# EAGLE board fifth (EAGLE 7.1.0)
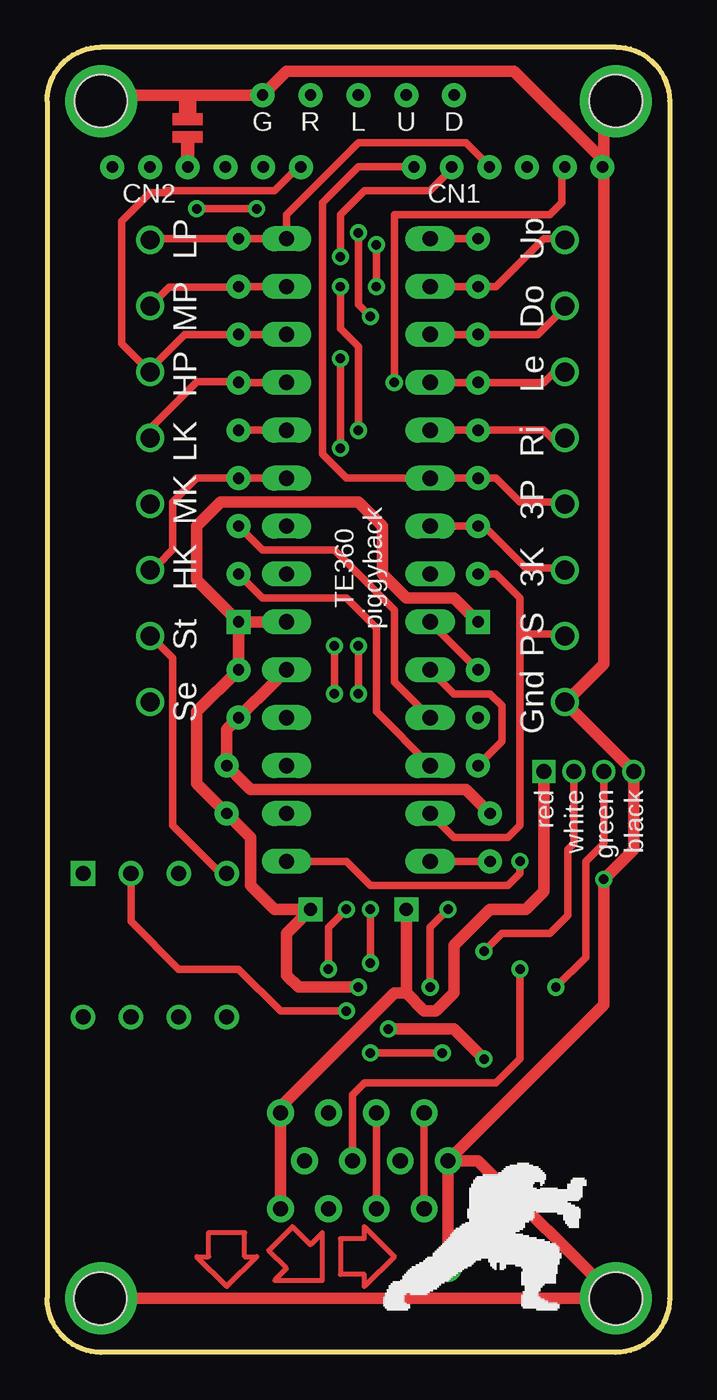
[diagram p0: board, top side]
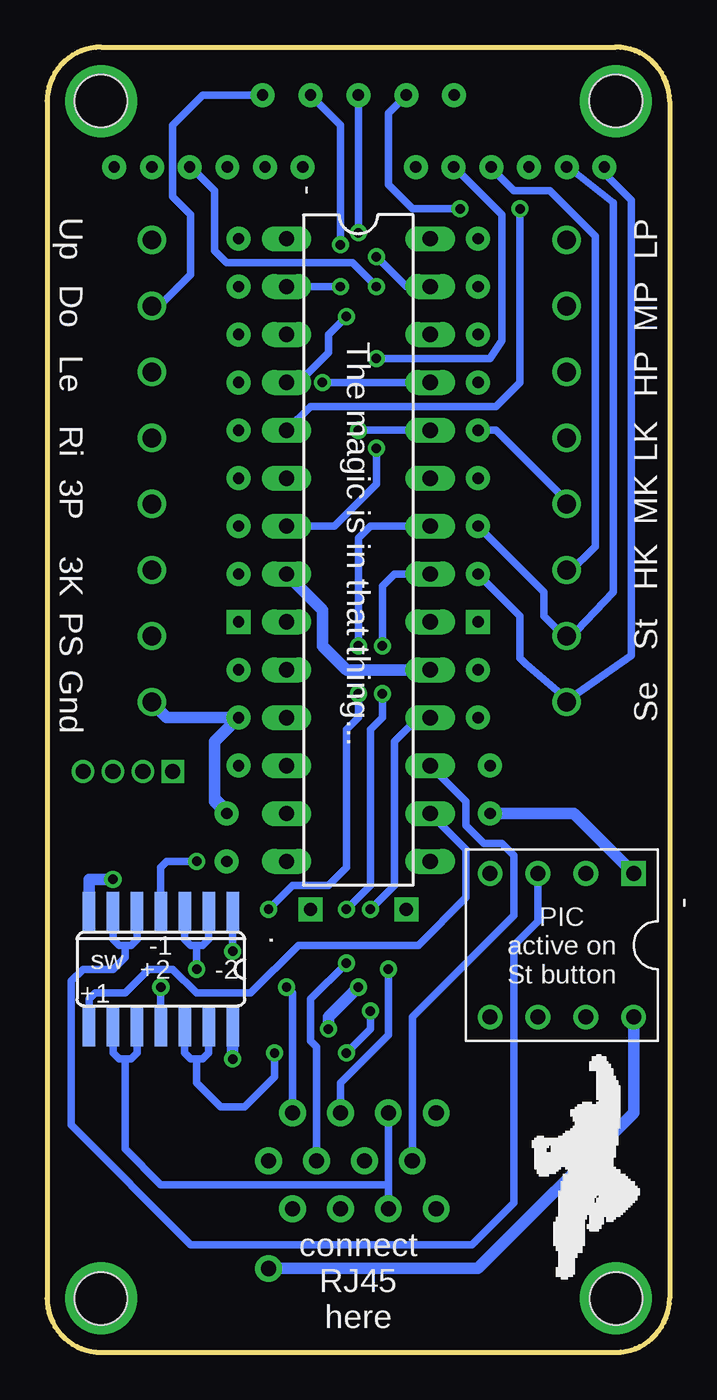
[diagram p1: board, bottom side, seen from below]

Size 33.02 x 69.21 mm. Coordinates in mm from the lower left corner, seen from the top.
Outline: 33.02,66.36 33.02,2.86 arc-90 30.16,0 2.86,0 arc-90 0,2.86 0,66.36 arc-90 2.86,69.21 30.16,69.21 arc-90 33.02,66.36
Copper layers (1*16): Top 0.035mm / dielectric 1.5mm / Bottom 0.035mm
Design rules "default *": minimum track width 10mil, minimum drill 24mil, track to track 8mil, track to pad 8mil, pad to pad 8mil, via to via 8mil, smd to smd 8mil, copper to edge 40mil, drill to drill 8mil, minimum pad ring 10mil, minimum via ring 8mil, stop-mask expansion 4mil, vias tented up to drill 20mil, thermal gap 10mil
Holes 2.8 mm at 2.86,66.36 30.16,66.36 30.16,2.86 2.83,2.86

## Footprints (pad centres in the part's own frame; a part is rotated, then mirrored left to right if it is on the bottom)
DIL28 = drill 0.813 long: 1 -16.51,-3.81; 2 -13.97,-3.81; 3 -11.43,-3.81; 4 -8.89,-3.81; 5 -6.35,-3.81; 6 -3.81,-3.81; 7 -1.27,-3.81; 8 1.27,-3.81; 9 3.81,-3.81; 10 6.35,-3.81; 11 8.89,-3.81; 12 11.43,-3.81; 13 13.97,-3.81; 14 16.51,-3.81; 15 16.51,3.81; 16 13.97,3.81; 17 11.43,3.81; 18 8.89,3.81; 19 6.35,3.81; 20 3.81,3.81; 21 1.27,3.81; 22 -1.27,3.81; 23 -3.81,3.81; 24 -6.35,3.81; 25 -8.89,3.81; 26 -11.43,3.81; 27 -13.97,3.81; 28 -16.51,3.81
DIP8 = drill 0.8 square: 1 -3.81,-3.81 | drill 0.8: 2 -1.27,-3.81; 3 1.27,-3.81; 4 3.81,-3.81; 5 3.81,3.81; 6 1.27,3.81; 7 -1.27,3.81; 8 -3.81,3.81
SO14 = smd 0.66 x 2.032: 1 -3.81,-3.073; 2 -2.54,-3.073; 3 -1.27,-3.073; 4 0,-3.073; 5 1.27,-3.073; 6 2.54,-3.073; 7 3.81,-3.073; 8 3.81,3.073; 9 2.54,3.073; 10 1.27,3.073; 11 0,3.073; 12 -1.27,3.073; 13 -2.54,3.073; 14 -3.81,3.073

## Placement (x,y rotation side)
'  [DIL28]  16.51,42.55 270 bottom
-  [DIP8]  5.72,21.59 180 bottom
.  [SO14]  26.99,20.32 180 bottom

## Library data of the parts
' = pic18f2550
- = dp_devices
. = 40xx

## Nets
S$4: '.20 -.1
S$6: -.3
S$13: '.16
S$16: '.7
S$17: '.27
S$23: '.25
S$24: -.2
S$27: '.8 '.19
S$28: '.6
S$54: '.24
S$55: '.5
S$59: '.4
S$60: -.8
S$62: '.2

## Tracks (layer width: path | path; a pad name or v marks a point on that pad's centre or on a via)
S$1  (via drill 0.6 pad 1.27, 1 pad 3.81)
  Top 0.406: v11.43,66.67 7.94,66.67 | 7.3,65.72 7.3,66.04
  Top 0.61: 29.53,63.18 29.53,36.51 27.62,34.61 | 29.53,63.18 24.77,67.94 12.7,67.94 v11.43,66.67 7.62,66.67 | 29.53,63.18 29.53,65.72 v30.16,66.36 | 7.62,66.67 7.3,66.67 | 7.3,66.67 3.17,66.67 v2.86,66.36 | 7.62,66.67 7.62,65.72 | 7.3,66.67 7.3,65.72
S$3
  Top 0.406: 5.4,59.05 12.7,59.05 12.7,60.32 16.51,64.13 22.23,64.13 23.5,62.86
S$4  (via drill 0.5 pad 0.25, 0.6 pad 1.27, 0.7 pad 1.27)
  Top 0.406: 7.94,33.97 7.94,30.48
  Top 0.61: v10.16,38.73 v10.16,36.19 7.94,33.97 7.94,30.16 v9.52,28.57 10.8,27.3 10.8,24.76 12.07,23.5 v13.97,23.5 12.7,22.22 12.7,20 13.34,19.37 v16.51,19.37 | v10.16,38.73 '.20 | v10.16,38.73 7.94,40.96 7.94,43.81 9.21,45.08 16.51,45.08 17.78,43.81 17.78,41.27 19.05,40 21.59,40 v22.86,38.73 | v23.18,15.56 21.59,17.14 v18.1,17.14
  Bottom 0.61: -.1 5.08,28.57 v9.52,28.57 | v16.51,19.37 18.1,17.78 v18.1,17.14 | 23.18,16.51 v23.18,15.56
S$5  (via drill 0.8 pad 1.42)
  Bottom 0.406: v14.92,12.7 14.92,8.89 | 14.92,8.89 26.99,8.89 28.89,10.79 28.89,15.56 | 28.26,16.51 28.26,15.87 28.57,15.56 28.89,15.56 | 28.89,15.56 29.21,15.56 29.53,15.87 29.53,16.51 | 14.92,8.89 v14.92,7.62
S$6
  Bottom 0.406: -.3 6.99,22.86 8.25,21.59 8.25,7.94 10.48,5.71 25.4,5.71 31.75,12.06 31.75,19.68 31.12,20.32 29.53,20.32 28.89,20.96 28.89,21.59 | 28.26,22.54 28.26,21.91 28.57,21.59 28.89,21.59 | 28.89,21.59 29.21,21.59 29.53,21.91 29.53,22.86
S$7  (via drill 1 pad 1.42)
  Top 0.406: v5.46,55.49 6.46,56.49 9.96,56.49
S$8  (via drill 0.7 pad 1.27, 0.8 pad 0.81, 0.8 pad 1.42)
  Top 0.61: v19.05,23.5 19.05,19.05 | 19.05,19.05 20,18.1 20.64,18.1 21.59,19.05 21.59,21.59 23.5,23.5 25.4,23.5 26.35,24.45 v26.35,30.8 | 19.05,19.05 18.41,19.05 12.38,13.02 v12.38,12.7 v12.38,7.62
S$9  (via drill 0.8 pad 1.42)
  Bottom 0.406: v13.65,10.16 13.65,17.78 8.25,23.18 8.25,26.35 8.89,26.99 9.84,26.99 10.8,27.94 10.8,29.21 12.7,31.11
S$10  (via drill 0.6 pad 1.27)
  Top 0.406: 12.7,53.97 v10.16,53.97 7.3,53.97 5.72,52.39 5.4,52.39
S$11  (via drill 0.6 pad 1.27)
  other vias: 10.16,59.05
S$12  (via drill 0.6 pad 1.27)
  Top 0.406: 20.32,28.57 21.59,27.3 24.45,27.3 25.08,27.94 25.08,38.1 | v22.86,41.27 23.81,41.27 25.08,40 25.08,38.1 | 27.3,38.1 25.08,38.1
S$13
  Bottom 0.406: '.16 10.8,26.67 10.8,24.13 13.34,21.59 19.69,21.59 22.23,19.05 25.08,19.05 26.35,20.32 27.62,20.32 28.89,19.05 30.48,19.05 30.8,18.73 30.8,18.1
S$14  (via drill 0.6 pad 1.27)
  Top 0.406: 12.7,48.89 v10.16,48.89
  Bottom 0.406: 5.17,44.86 9.21,48.89 v10.16,48.89
S$16  (via drill 0.5 pad 0.25)
  Top 0.406: v15.56,52.7 v15.56,47.94
  Bottom 0.406: v15.56,52.7 9.52,52.7 8.89,53.66 8.89,60.32 11.43,62.86 | '.7 17.78,43.81 15.56,46.04 v15.56,47.94
S$17  (via drill 0.5 pad 0.25, 0.6 pad 1.27)
  Top 0.406: v10.16,56.52 '.27 | v15.56,58.1 15.56,60.32 16.83,61.59 20.32,61.59 21.59,62.86
  Bottom 0.406: '.27 13.97,56.52 v15.56,58.1
S$18  (via drill 0.6 pad 1.27)
  Top 0.406: 20.32,59.05 v22.86,59.05
S$19  (via drill 0.6 pad 1.27)
  Top 0.406: 20.32,56.52 v22.86,56.52 23.81,56.52 26.35,59.05 27.62,59.05
S$20  (via drill 0.6 pad 1.27)
  Top 0.406: 20.32,53.97 v22.86,53.97 26.04,53.97 27.3,55.24
S$21  (via drill 0.6 pad 1.27)
  Top 0.406: 20.32,51.43 v22.86,51.43 26.35,51.43 26.99,52.07
S$22  (via drill 0.6 pad 1.27)
  Top 0.406: 20.32,48.89 v22.86,48.89 26.35,48.89 26.99,48.26
S$23  (via drill 0.5 pad 0.25)
  Top 0.406: v18.41,51.43 18.41,60.32 26.67,60.32 27.3,60.96 27.3,62.86
  Bottom 0.406: '.25 v18.41,51.43
S$24  (via drill 0.5 pad 0.25)
  Top 0.406: v20.96,15.87 v17.14,15.87 | -.2 4.45,22.86 6.99,20.32 10.16,20.32 12.38,18.1 v15.88,18.1
  Bottom 0.406: 24.45,16.51 24.45,15.87 24.77,15.56 25.08,15.56 | 25.08,15.56 25.4,15.56 25.72,15.87 25.72,16.51 | 25.08,15.56 25.08,14.29 23.81,13.02 22.54,13.02 20.96,14.6 v20.96,15.87 | v17.14,15.87 15.88,17.14 v15.88,18.1
S$25  (via drill 0.6 pad 1.27)
  Top 0.406: 20.32,36.19 21.59,34.92 23.5,34.92 24.13,34.29 24.13,32.39 v22.86,31.11
S$26  (via drill 0.6 pad 1.27)
  Top 0.406: 20.32,38.73 v22.86,36.19
S$27  (via drill 0.6 pad 1.27)
  Top 0.406: '.19 v10.16,33.66 9.52,33.02
  Top 0.61: v23.5,28.57 22.23,29.84 10.8,29.84 v9.52,31.11 9.52,33.02 '.19
  Bottom 0.406: 24.13,29.21 24.13,29.53 | 24.13,29.53 24.13,32.39 | 24.13,29.53 23.5,28.89
  Bottom 0.61: 27.3,34.29 26.67,33.66 v22.86,33.66 24.13,32.39 24.13,29.21 v23.5,28.57 | '.19 17.14,36.19 18.41,37.47 18.41,39.37 '.8
S$28  (via drill 0.6 pad 1.27)
  Top 0.406: 19.05,62.86 16.51,62.86 14.61,60.96 14.61,47.62 15.88,46.36 '.6 v22.86,46.36 23.81,46.36 25.08,45.08 27.3,45.08
S$29
  Top 0.406: 6.35,61.59 12.07,61.59 13.34,62.86
S$30  (via drill 0.6 pad 1.27)
  Top 0.406: 20.32,26.04 v23.5,26.04
S$31  (via drill 0.6 pad 1.27)
  Top 0.406: 20.32,31.11 17.46,33.97 17.46,38.42 15.88,40 11.43,40 v10.16,41.27
  Bottom 0.406: 3.81,62.86 2.04,61.09 2.04,36.97 5.4,34.61 7.62,36.51 7.94,36.83 7.94,39.05 v10.16,41.27
S$32  (via drill 0.6 pad 1.27)
  Top 0.406: 20.32,43.81 v22.86,43.81 23.18,43.81 25.4,41.59 27.62,41.59
S$33  (via drill 1 pad 1.42)
  Top 0.406: v5.46,51.99 3.96,53.49 3.96,59.99 5.46,61.49 6.46,61.49
S$34  (via drill 1 pad 1.42)
  Top 0.406: 9.96,51.49 7.96,51.49 5.46,48.99 v5.46,48.49
S$35  (via drill 0.6 pad 1.27)
  Top 0.406: 12.7,51.43 v10.16,51.43
S$37  (via drill 0.5 pad 0.25, 0.8 pad 1.42)
  Top 0.406: v15.24,37.47 v15.24,34.92 | v17.14,23.5 v17.14,20.64
  Bottom 0.406: v18.73,10.16 18.73,16.19 19.05,16.51 19.05,18.73 v17.14,20.64 | v17.14,23.5 15.88,24.76 15.88,33.02 15.24,33.66 v15.24,34.92 | 12.7,41.27 14.61,41.27 15.24,40.64 v15.24,37.47
S$41
  Top 0.406: 5.72,37.78 6.67,36.83 6.67,27.94 9.21,25.4
S$44  (via drill 0.5 pad 0.25, 0.8 pad 1.42)
  Top 0.406: v16.19,10.16 16.19,13.65 16.83,14.29 23.81,14.29 25.08,15.56 v25.08,20.32
  Bottom 0.406: 24.45,22.54 24.45,21.91 24.77,21.59 25.08,21.59 | 25.08,21.59 25.4,21.59 25.72,21.91 25.72,22.54 | 25.08,21.59 v25.08,20.32
S$45
  Top 0.254: 16.83,6.03 16.83,6.67 18.41,5.08 16.83,3.49 16.83,4.13 15.56,4.13 15.56,6.03 16.83,6.03
S$46  (via drill 0.5 pad 0.25, 0.8 pad 1.42)
  Top 0.406: v15.88,23.5 14.92,22.54 v14.92,20.32 | v17.46,12.7 v17.46,7.62
  Bottom 0.406: 12.7,33.66 13.34,33.66 14.61,32.39 14.61,24.76 v15.88,23.5 | v14.92,20.32 14.92,16.83 17.46,14.29 v17.46,12.7
S$47  (via drill 0.5 pad 0.25)
  Top 0.406: 12.7,26.04 15.88,26.04 17.14,24.76 24.45,24.76 25.08,25.4 v25.08,26.04
  Bottom 0.406: 26.99,24.45 26.99,25.72 26.67,26.04 v25.08,26.04
S$48  (via drill 0.5 pad 0.25, 0.8 pad 1.42)
  Top 0.406: v16.51,37.47 v16.51,34.92 | v21.27,23.5 20.32,22.54 v20.32,19.37 | v20,12.7 v20,7.62
  Bottom 0.406: 12.7,43.81 15.88,43.81 16.51,43.18 v16.51,37.47 | v16.51,34.92 16.51,33.66 17.14,33.02 17.14,25.72 18.1,24.76 20,24.76 v21.27,23.5 | v20.32,19.37 20,19.05 v20,12.7
S$49  (via drill 0.6 pad 1.27)
  Top 0.406: 12.7,46.36 v10.16,46.36 7.94,46.36 6.67,45.08 6.67,42.56 5.9,41.79
S$50  (via drill 0.6 pad 1.27)
  Top 0.406: 20.32,33.66 18.41,35.56 18.41,39.37 15.24,42.55 11.43,42.55 v10.16,43.81
  Bottom 0.406: v10.16,43.81 6.67,40.32 6.67,39.05 5.72,38.1
S$51
  Bottom 0.406: 5.4,37.78 2.99,40.32 2.99,60.96 5.4,62.86
S$52
  Top 0.254: 14.61,3.81 14.61,6.35 13.97,5.71 13.02,6.67 11.75,5.4 12.7,4.44 12.07,3.81 14.61,3.81
S$53
  Top 0.254: 10.48,5.08 11.11,5.08 9.52,3.49 7.94,5.08 8.57,5.08 8.57,6.35 10.48,6.35 10.48,5.08
S$54  (via drill 0.5 pad 0.25)
  Top 0.406: v15.56,56.52 15.56,54.29 16.51,53.34 v16.51,48.89
  Bottom 0.406: 25.4,62.86 24.13,61.59 24.13,58.42 23.5,57.78 16.83,57.78 v15.56,56.52 | v16.51,48.89 '.24
S$55  (via drill 0.5 pad 0.25, 0.6 pad 1.27)
  Top 0.406: v7.94,60.64 v11.11,60.64
  Bottom 0.406: '.5 19.05,50.16 9.21,50.16 7.94,51.43 v7.94,60.64 | v11.11,60.64 13.65,60.64 14.92,61.91 14.92,65.72 v13.97,66.67
S$56
  Top 0.406: 7.62,64.45 7.62,62.86
S$58  (via drill 0.5 pad 0.25, 0.8 pad 0.81)
  Top 0.406: v29.53,30.8 29.53,26.99 28.57,26.04 28.57,20.96 v26.99,19.37
  Bottom 0.406: 26.99,18.1 v26.99,19.37
S$59  (via drill 0.5 pad 0.25, 0.6 pad 1.27)
  Top 0.406: v17.14,54.93 16.51,55.56 v16.51,59.37
  Bottom 0.406: v16.51,59.37 v16.51,66.67 | v17.14,54.93 18.1,53.97 18.1,53.02 19.69,51.43 '.4
S$60  (via drill 0.5 pad 0.25, 0.8 pad 0.81, 0.8 pad 1.42, 1 pad 3.81)
  Top 0.61: v21.27,10.16 29.53,18.41 v29.53,25.08 31.12,26.67 v31.12,30.8 27.62,34.29 | v21.27,10.16 v21.27,4.44 | v21.27,10.16 22.86,10.16 v30.16,2.86 v2.86,2.86
  Bottom 0.61: 30.8,24.13 30.8,25.08 v29.53,25.08 | v21.27,4.44 10.16,4.44 1.91,12.7 -.8
S$61
  Bottom 0.406: 9.52,62.86 8.25,61.59 6.35,61.59 3.95,59.19 3.95,42.74 5.4,41.29
S$62  (via drill 0.5 pad 0.25, 0.6 pad 1.27)
  Top 0.406: v17.46,58.74 v17.46,56.52
  Bottom 0.406: '.2 v17.46,56.52 | v19.05,66.67 17.46,65.09 v17.46,58.74
S$63  (via drill 0.6 pad 1.27)
  Bottom 0.406: v21.59,66.67 24.77,66.67 26.35,65.09 26.35,61.28 25.4,60.32 25.4,57.15 26.99,55.56
S$64  (via drill 0.5 pad 0.25, 0.8 pad 0.81)
  Top 0.406: v27.94,30.8 27.94,26.99 27.62,26.67 27.62,23.18 26.67,22.22 24.13,22.22 v23.18,21.27
  Bottom 0.406: 23.18,22.54 v23.18,21.27
S$66  (via drill 0.6 pad 1.27)
  other vias: 3.46,62.85
S$67  (via drill 0.6 pad 1.27)
  other vias: 5.46,62.85
S$68  (via drill 0.6 pad 1.27)
  other vias: 7.46,62.85
S$69  (via drill 0.6 pad 1.27)
  other vias: 9.46,62.85
S$70  (via drill 0.6 pad 1.27)
  other vias: 11.46,62.85
S$71  (via drill 0.6 pad 1.27)
  other vias: 13.46,62.85
S$72  (via drill 0.6 pad 1.27)
  other vias: 19.46,62.85
S$73  (via drill 0.6 pad 1.27)
  other vias: 21.46,62.85
S$74  (via drill 0.6 pad 1.27)
  other vias: 23.46,62.85
S$75  (via drill 0.6 pad 1.27)
  other vias: 25.46,62.85
S$76  (via drill 0.6 pad 1.27)
  other vias: 27.46,62.85
S$77  (via drill 0.6 pad 1.27)
  other vias: 29.46,62.85
S$79
  Top 0.406: 7.3,64.45 7.3,62.86
S$85  (via drill 1 pad 1.42)
  other vias: 5.46,58.99
S$86  (via drill 1 pad 1.42)
  other vias: 5.46,34.49
S$87  (via drill 1 pad 1.42)
  other vias: 5.46,37.99
S$90  (via drill 1 pad 1.42)
  other vias: 5.46,41.49
S$91  (via drill 1 pad 1.42)
  other vias: 5.46,44.99
S$92  (via drill 1 pad 1.42)
  other vias: 27.46,48.49
S$93  (via drill 1 pad 1.42)
  other vias: 27.46,51.99
S$94  (via drill 1 pad 1.42)
  other vias: 27.46,55.49
S$95  (via drill 1 pad 1.42)
  other vias: 27.46,58.99
S$96  (via drill 1 pad 1.42)
  other vias: 27.46,34.49
S$97  (via drill 1 pad 1.42)
  other vias: 27.46,37.99
S$98  (via drill 1 pad 1.42)
  other vias: 27.46,41.49
S$99  (via drill 1 pad 1.42)
  other vias: 27.46,44.99
(copper drawn outside any net)
  shapes: Top area x2

## Text on the board
tNames: G | R | L | U | D | CN2 | CN1 | LP | Up | MP | Do | HP | Le | LK | Ri | MK | 3P | HK | TE360 / piggyback | 3K | St | PS | Se | Gnd | red | white | green | black
bNames: LP | Up | MP | Do | HP | Le | LK | Ri | MK | 3P | The magic is in that thing... | HK | 3K | St | PS | Se | Gnd | PIC / active on / St button | -1 | -2 | +2 | sw | +1 | connect / RJ45 / here